# Altium PCB SENSORS_SMALL_PCB.PcbDoc
Units mil, origin at the board's own origin, x right, y up, seen from the top; angles counter-clockwise.
Board outline 4094.49 x 606.38 mil, 4 copper layers (01 SIGNAL, 02 GND, 03 PWR, 04 SIGNAL), stack 61.811 mil thick; 29 components, 26 nets, 132 pads, 52 vias.
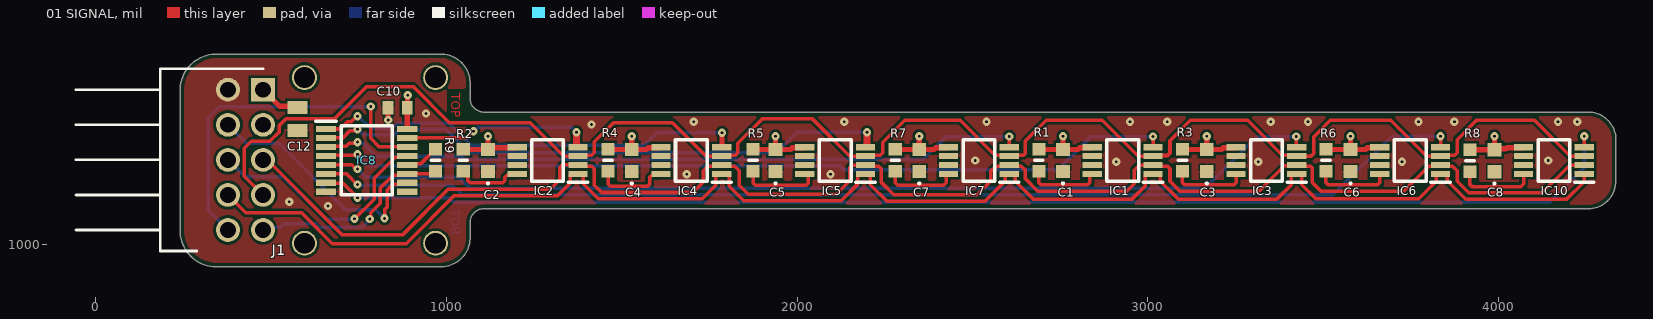
[diagram p0: 01 SIGNAL view]
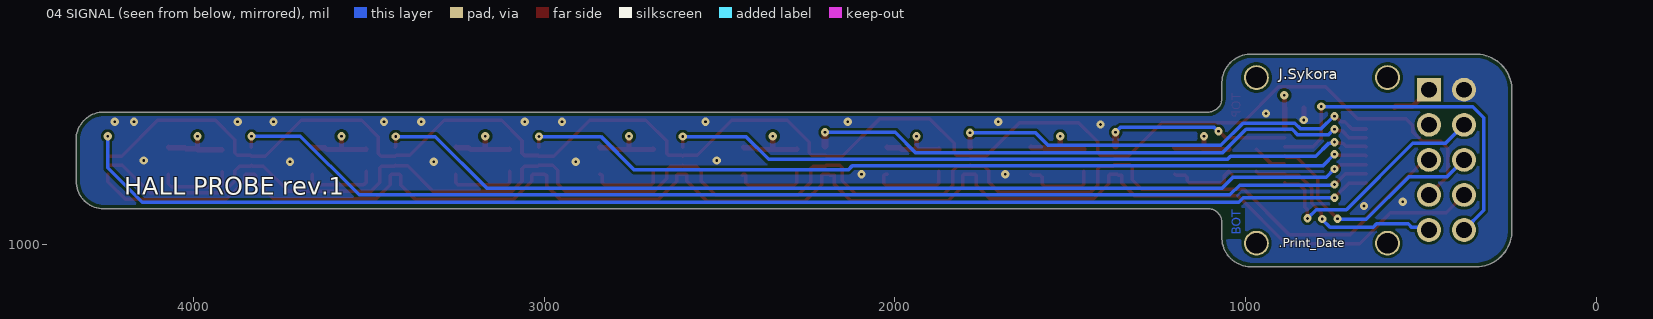
[diagram p1: 04 SIGNAL view, seen from below]
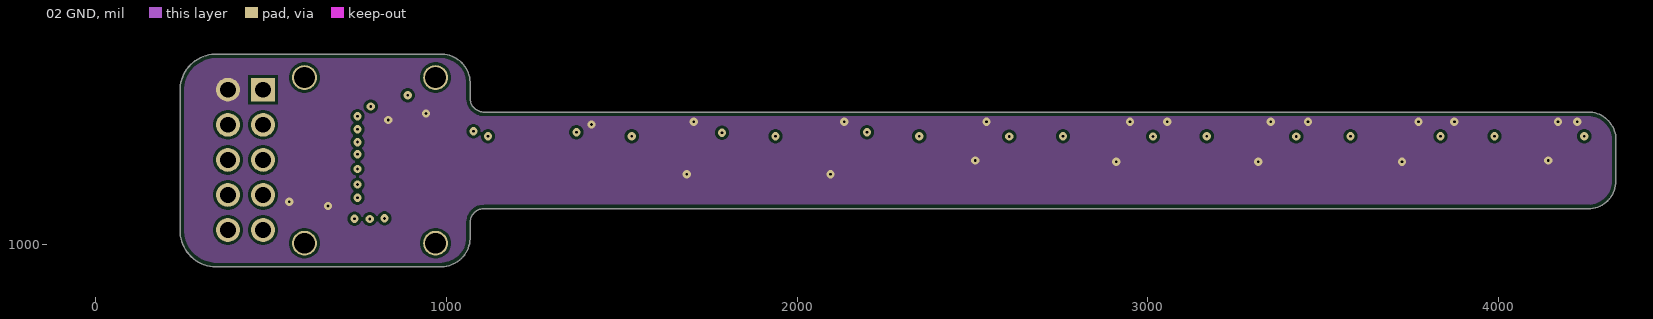
[diagram p2: 02 GND]
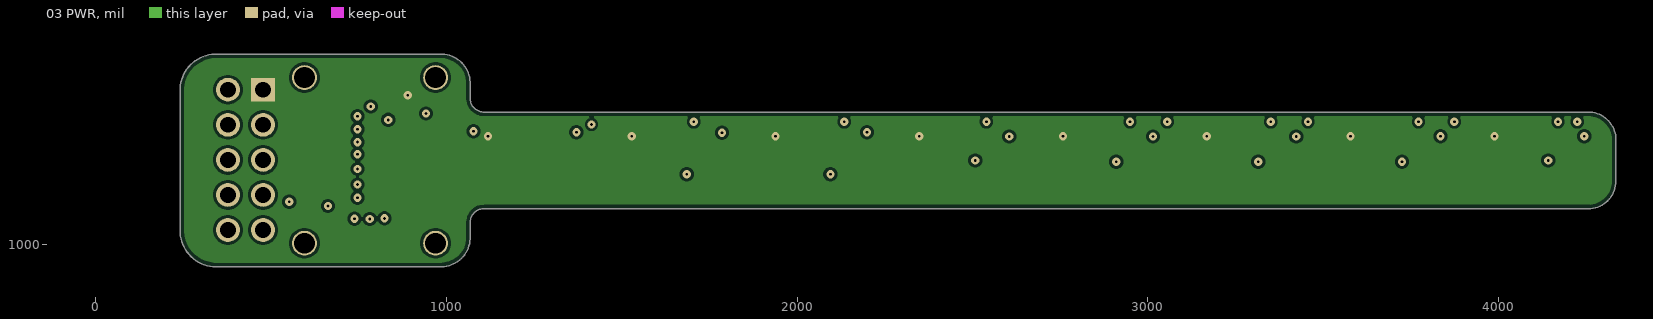
[diagram p3: 03 PWR]
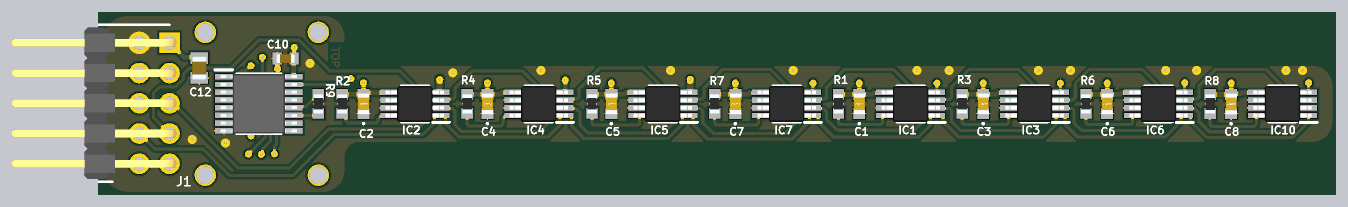
[diagram p4: 3D render of the assembled board from above, using the file's embedded part models]

## Layer stack, top to bottom
Top Solder: solder mask 0.5, Solder Resist, Dk 3.8
01 SIGNAL: signal copper 1.378
Dielectric 1: prepreg 3.937, 2313, Dk 4.05
02 GND: signal copper 0.689
Core: core 49.8031, FR-4, Dk 4.5
03 PWR: signal copper 0.689
Dielectric 2: prepreg 3.937, 2313, Dk 4.05
04 SIGNAL: signal copper 1.378
Bottom Solder: solder mask 0.5, Solder Resist, Dk 3.8

## Board outline
342.52,936.93 985.98,936.93 ccw(c984.25,1019.68) 1066.93,1023.62 1066.93,1062.99 cw(c1106.3,1062.99) 1106.3,1102.36 4255.91,1102.36 ccw(c4255.91,1181.1) 4334.65,1181.1 4334.65,1299.21 ccw(c4255.91,1299.21) 4255.91,1377.95 1106.3,1377.95 cw(c1106.3,1417.32) 1066.93,1417.32 1066.93,1456.69 ccw(c984.25,1460.63) 988.19,1543.31 338.58,1543.31 ccw(c342.52,1440.95) 240.16,1437.01 240.16,1043.31 ccw(c342.52,1039.37)

## Design rules (kind name [scope] priority, off if disabled: settings)
BoardOutlineClearance [All] p1: gap=11.81 ignorepadtopadclearanceinfootprint=FALSE
Clearance [All] p1: gap=7.87 ignorepadtopadclearanceinfootprint=FALSE
ComponentClearance [All] p1: gap=4 collisioncheckmode=3 verticalgap=4 showdistances=TRUE
DiffPairsRouting [All] p1: maxlimit=4 minlimit=4 mostfreqgap=4 toplayer_minwidth=4 toplayer_maxwidth=71497.94 toplayer_prefwidth=4 midlayer1_minwidth=4 midlayer1_maxwidth=71497.94 midlayer1_prefwidth=4 midlayer2_minwidth=4 midlayer2_maxwidth=71497.94 midlayer2_prefwidth=4 bottomlayer_minwidth=4 bottomlayer_maxwidth=71497.94 bottomlayer_prefwidth=4 maxuncoupledlength=500
Height [All] p1: minheight=0 maxheight=71497.94 prefheight=500
HoleSize [All] p1: absolutevalues=TRUE maxlimit=248.03 minlimit=3.94 maxpercent=80.000 minpercent=20.000
HoleToHoleClearance [All] p1: gap=9.84 allowstackedmicrovias=FALSE
MinimumAnnularRing [All] p1: minimumring=7.87
MinimumSolderMaskSliver [All] p1: minsoldermaskwidth=0
PlaneClearance [All] p1: clearance=4
PlaneConnect PlaneConnectPowerPads [InPadClass('PowerPads')] p1: planeconnectstyle=Direct reliefexpansion=20 reliefentries=4 reliefconductorwidth=10 reliefairgap=10
PlaneConnect [All] p2: pad.planeconnectstyle=Relief pad.reliefexpansion=11.81 pad.reliefentries=4 pad.reliefconductorwidth=4 pad.reliefairgap=4 via.planeconnectstyle=Direct via.reliefexpansion=11.81 via.reliefentries=4 via.reliefconductorwidth=5 via.reliefairgap=5
PolygonConnect PolygonConnectPowerPads [All vs (InPadClass('PowerPads'))] p1: connectstyle=Direct reliefconductorwidth=10 reliefentries=4 polygonreliefangle="90 Angle" airgapwidth=10
PolygonConnect [All] p2: thpad.connectstyle=Relief thpad.reliefconductorwidth=4 thpad.reliefentries=4 thpad.polygonreliefangle="90 Angle" thpad.airgapwidth=4 smdpad.connectstyle=Relief smdpad.reliefconductorwidth=4 smdpad.reliefentries=4 smdpad.polygonreliefangle="90 Angle" smdpad.airgapwidth=4 via.connectstyle=Direct via.reliefconductorwidth=5 via.reliefentries=4 via.polygonreliefangle="90 Angle" via.airgapwidth=5
RoutingVias [All] p1: holewidth=7.87 width=17.72 viastyle="Through Hole" minholewidth=7.87 minwidth=17.72 maxholewidth=248.03 maxwidth=257.87
SilkToSilkClearance [All] p1: silktosilkclearance=0
SilkToSolderMaskClearance [IsPad] p1: minsilkscreentomaskgap=4 clearancetoexposedcopper=TRUE
SolderMaskExpansion [All] p1: expansion=2.95 istentingtop=FALSE
Width [All] p1: maxlimit=71497.94 minlimit=7.87 preferedwidth=10
20 further rules are at their usual default settings.

## Components (designator, comment, footprint, x,y, rotation, side; value= is the part's Value field where it differs from the comment)
C1 "0.01uF" C0603 2757.99,1239.57 r90 top
C2 "0.01uF" C0603 1117.99,1239.57 r90 top
C3 "0.01uF" C0603 3167.99,1239.57 r90 top
C4 "0.01uF" C0603 1527.99,1239.57 r90 top
C5 "0.01uF" C0603 1937.99,1239.57 r90 top
C6 "0.01uF" C0603 3577.99,1239.57 r90 top
C7 "0.01uF" C0603 2347.99,1239.57 r90 top
C8 "0.01uF" C0603 3988.19,1239.17 r90 top
C10 "100nF" CAPC1608X95N 860.24,1389.76 r0 top
C12 "47uF 10VDC 0805" CAPC2012X145N 574.8,1358.27 r90 top
IC1 "TMAG5170A1QDGKR" SOP65P490X110-8N 2927.99,1239.57 r180 top
IC2 "TMAG5170A1QDGKR" SOP65P490X110-8N 1287.99,1239.57 r180 top
IC3 "TMAG5170A1QDGKR" SOP65P490X110-8N 3337.99,1239.57 r180 top
IC4 "TMAG5170A1QDGKR" SOP65P490X110-8N 1697.99,1239.57 r180 top
IC5 "TMAG5170A1QDGKR" SOP65P490X110-8N 2107.99,1239.57 r180 top
IC6 "TMAG5170A1QDGKR" SOP65P490X110-8N 3747.99,1239.57 r180 top
IC7 "TMAG5170A1QDGKR" SOP65P490X110-8N 2517.99,1239.57 r180 top
IC8 "M74HC595YTTR" SOP65P640X120-16N 771.65,1240.16 r0 top
IC10 "TMAG5170A1QDGKR" SOP65P490X110-8N 4157.99,1239.57 r180 top
J1 "M20-9950545" HDRRA10W66P254_2X5_1270X254X528P 476.38,1441.73 r90 top
R1 "10K" RESC1608X55N 2688.98,1240.16 r270 top
R2 "10K" RESC1608X55N 1047.24,1240.16 r270 top
R3 "10K" RESC1608X55N 3098.43,1240.16 r270 top
R4 "10K" RESC1608X55N 1460.63,1240.16 r270 top
R5 "10K" RESC1608X55N 1874.02,1240.16 r270 top
R6 "10K" RESC1608X55N 3507.87,1240.16 r270 top
R7 "10K" RESC1608X55N 2279.53,1240.16 r270 top
R8 "10K" RESC1608X55N 3918.54,1239.57 r270 top
R9 "0R" RESC1608X55N 968.5,1240.16 r270 top

## Footprints (in the part's own frame and the unit in brackets; to place one, negate y for a bottom-side part, rotate by r counter-clockwise, add the part's x,y. Pads: shape width x height; smd on the part's side, far side on the other; paste and mask are expansions set on the pad)
C0603 [mm]
  rect 0.95x1 smd: 1(-0.8,0) 2(0.8,0)
  silkscreen extent -1.7,-0.05 -1.6,0.05, body extent -0.87,-0.48 0.88,0.47, height 0.87
CAPC1608X95N [mm]
  rect 0.78x0.98 smd: 1(-0.7,0) 2(0.7,0)
  body extent -0.8,-0.4 0.8,0.4, height 0.95
CAPC2012X145N [mm]
  rect 0.97x1.47 smd: 1(-0.83,0) 2(0.83,0)
  body extent -1,-0.63 1,0.63, height 1.45
HDRRA10W66P254_2X5_1270X254X528P [mm]
  rect 1.725x1.725 hole 1.15: 1(0,0)
  round 1.725 hole 1.15: 2(0,2.54) 3(-2.54,0) 4(-2.54,2.54) 5(-5.08,0) 6(-5.08,2.54) 7(-7.62,0) 8(-7.62,2.54) 9(-10.16,0) 10(-10.16,2.54)
  silkscreen extent -11.68,0 1.52,13.54, body extent -11.43,-0.53 1.27,13.23, height 2.54
RESC1608X55N [mm]
  rect 0.9x0.95 smd: 1(-0.8,0) 2(0.8,0)
  silkscreen extent 0,-0.3 0,0.3, body extent -0.8,-0.4 0.8,0.4, height 0.55
SOP65P490X110-8N [mm]
  rect 1.4x0.45 smd: 1(-2.2,0.975) 2(-2.2,0.325) 3(-2.2,-0.325) 4(-2.2,-0.975) 5(2.2,-0.975) 6(2.2,-0.325) 7(2.2,0.325) 8(2.2,0.975)
  silkscreen extent -2.9,-1.5 1.15,1.55, body extent -2.45,-1.5 2.45,1.5, height 1.1
SOP65P640X120-16N [mm]
  rect 1.475x0.45 smd: 1(-2.938,2.275) 2(-2.938,1.625) 3(-2.938,0.975) 4(-2.938,0.325) 5(-2.938,-0.325) 6(-2.938,-0.975) 7(-2.938,-1.625) 8(-2.938,-2.275) 9(2.938,-2.275) 10(2.938,-1.625) 11(2.938,-0.975) 12(2.938,-0.325) 13(2.938,0.325) 14(2.938,0.975) 15(2.938,1.625) 16(2.938,2.275)
  silkscreen extent -3.67,-2.5 1.85,2.85, body extent -3.2,-2.5 3.2,2.5, height 1.2

## Part data
C1 C2 C3 C4 C5 C6 C7 C8: library part C0603C103J4RACTU, "Capacitor", Manufacturer_Name=KEMET, Mouser Part Number=80-C0603C103J4R, Arrow Part Number=C0603C103J4RACTU, Arrow Price/Stock=https://www.arrow.com/en/products/c0603c103j4ractu/kemet-corporation, Datasheet Link=https://content.kemet.com/datasheets/KEM_C1002_X7R_SMD.pdf, Height=0.87mm, Manufacturer_Part_Number=C0603C103J4RACTU, Mouser Price/Stock=https://www.mouser.com/Search/Refine.aspx?Keyword=80-C0603C103J4R
C10: library part C0603C104J4RAC, "Capacitor", Manufacturer_Name=KEMET, Mouser Part Number=80-C0603C104J4RAC, Arrow Part Number=C0603C104J4RAC, Arrow Price/Stock=https://www.arrow.com/en/products/c0603c104j4rac/kemet-corporation?region=nac, Datasheet Link=https://datasheet.datasheetarchive.com/originals/distributors/SFDatasheet-4/sf-00083930.pdf, Height=0.95mm, Manufacturer_Part_Number=C0603C104J4RAC, Mouser Price/Stock=https://www.mouser.co.uk/ProductDetail/KEMET/C0603C104J4RAC?qs=sykUljcfnH31MXmq5HGjkg%3D%3D
C12: library part GRM21BR61A476ME15K, "Capacitor", Manufacturer_Name="Murata Electronics", Mouser Part Number=81-GRM21BR61A476ME5K, Arrow Part Number=GRM21BR61A476ME15K, Arrow Price/Stock=https://www.arrow.com/en/products/grm21br61a476me15k/murata-manufacturing?region=nac, Datasheet Link=http://www.murata.com/~/media/webrenewal/support/library/catalog/products/capacitor/mlcc/c02e.pdf, Height=1.45mm, Manufacturer_Part_Number=GRM21BR61A476ME15K, Mouser Price/Stock=https://www.mouser.co.uk/ProductDetail/Murata-Electronics/GRM21BR61A476ME15K?qs=hNud%2FORuBR153XPtoO6XtA%3D%3D
IC1 IC2 IC3 IC4 IC5 IC6 IC7 IC10: "Integrated Circuit", Manufacturer_Name="Texas Instruments", Mouser Part Number=595-TMAG5170A1QDGKR, Arrow Part Number=TMAG5170A1QDGKR, Arrow Price/Stock=https://www.arrow.com/en/products/tmag5170a1qdgkr/texas-instruments?region=nac, Datasheet Link=https://www.ti.com/lit/ds/symlink/tmag5170.pdf?ts=1631468164599&ref_url=https%253A%252F%252Fwww.ti.com%252Fsitesearch%252Fdocs%252Funiversalsearch.tsp%253FlangPref%253Den-US%2526searchTerm%253DTMAG5170A1QDGKR%2526nr%253D4, Height=1.1mm, Manufacturer_Part_Number=TMAG5170A1QDGKR, Mouser Price/Stock=https://www.mouser.co.uk/ProductDetail/Texas-Instruments/TMAG5170A1QDGKR?qs=7D1LtPJG0i2KumggWL5Glw%3D%3D
IC8: "Integrated Circuit", Manufacturer_Name=STMicroelectronics, Mouser Part Number=511-M74HC595YTTR, Arrow Part Number=M74HC595YTTR, Arrow Price/Stock=https://www.arrow.com/en/products/m74hc595yttr/stmicroelectronics, Datasheet Link=https://componentsearchengine.com/Datasheets/1/M74HC595YTTR.pdf, Height=1.2mm, Manufacturer_Part_Number=M74HC595YTTR, Mouser Price/Stock=https://www.mouser.co.uk/ProductDetail/STMicroelectronics/M74HC595YTTR?qs=WHlX%252B%252B9%2FRwCpo6YE5YKRQQ%3D%3D
J1: "Connector", Manufacturer_Name=Harwin, Mouser Part Number=855-M20-9950545, Datasheet Link=https://cdn.harwin.com/pdfs/M20-995.pdf, Height=5.28mm, Manufacturer_Part_Number=M20-9950545, Mouser Price/Stock=https://www.mouser.com/Search/Refine.aspx?Keyword=855-M20-9950545
R1 R2 R3 R4 R5 R6 R7 R8 R9: library part RK73B1JTTD103J, "Resistor", Manufacturer_Name="KOA Speer", Mouser Part Number=660-RK73B1JTTD103J, Arrow Part Number=RK73B1JTTD103J, Arrow Price/Stock=https://www.arrow.com/en/products/rk73b1jttd103j/koa-speer-electronics?region=asia, Datasheet Link=http://www.koaspeer.com/catimages/Products/RK73-RT/RK73-RT.pdf, Height=0.55mm, Manufacturer_Part_Number=RK73B1JTTD103J, Mouser Price/Stock=https://www.mouser.co.uk/ProductDetail/KOA-Speer/RK73B1JTTD103J?qs=hmtrJ2UjXcBKRTcwO9LloQ%3D%3D

## Free pads (board coordinates)
  round 70.87 hole 59.06: 2(968.5,1476.38) 3(968.5,1003.94) 4(594.49,1003.94) 5(594.49,1476.38)

## Via types
v1: diameter 23.62, hole 7.87, 01 SIGNAL to 04 SIGNAL, 52 vias

## Nets (pads, with @x,y where several pads share a name; then routed paths per layer and width w, separated by ;. In a path a pad name is that pad's centre, name@x,y a point inside that pad or via, vN(x,y) a via of type N, cw(c..) or ccw(c..) an arc to the next point about the centre after c; other vN are vias at no path point)
+3V3_S: C1.2 C2.2 C3.2 C4.2 C5.2 C6.2 C7.2 C8.2 C10.2 C12.2 IC1.5 IC2.5 IC3.5 IC4.5 IC5.5 IC6.5 IC7.5 IC8.16 IC10.5 J1.1 R1.1 R2.1 R3.1 R4.1 R5.1 R6.1 R7.1 R8.1 | length 1761.5
  01 SIGNAL w15: J1.1 523.37,1394.74 571,1394.74 C12.2 ; IC8.16 887.56,1329.96 887.56,1389.53 888.29,1390.26 888.29,1425.69 v1(888.78,1426.18) ; R2.1 1047.54,1271.36 1117.7,1271.36 C2.2 ; v1(1117.99,1309.06) C2.2 ; IC2.5 1200.02,1276.59 1123.52,1276.59 C2.2 ; R4.1 1460.93,1271.36 1527.7,1271.36 C4.2 ; v1(1527.99,1309.06) C4.2 ; IC4.5 1610.02,1276.59 1575.71,1276.59 1570.18,1271.06 C4.2 ; R5.1 1874.31,1271.36 1937.7,1271.36 C5.2 ; v1(1937.99,1309.06) C5.2 ; IC5.5 2020.02,1276.59 1985.71,1276.59 1980.18,1271.06 C5.2 ; R7.1 2279.82,1271.36 2347.7,1271.36 C7.2 ; v1(2347.99,1309.06) C7.2 ; IC7.5 2430.02,1276.59 2395.71,1276.59 2390.18,1271.06 C7.2 ; R1.1 2689.27,1271.36 2757.7,1271.36 C1.2 ; v1(2757.99,1309.06) C1.2 ; IC1.5 2840.02,1276.59 2805.71,1276.59 2800.18,1271.06 C1.2 ; R3.1 3098.72,1271.36 3167.7,1271.36 C3.2 ; v1(3167.99,1309.06) C3.2 ; IC3.5 3250.02,1276.59 3215.71,1276.59 3210.18,1271.06 C3.2 ; R6.1 3508.17,1271.36 3577.7,1271.36 C6.2 ; v1(3577.99,1309.06) C6.2 ; IC6.5 3660.02,1276.59 3625.71,1276.59 3620.18,1271.06 C6.2 ; R8.1 3918.74,1270.87 3987.99,1270.87 C8.2 ; v1(3988.19,1309.06) C8.2 ; IC10.5 4070.02,1276.59 4024.63,1276.59 4021.59,1273.56 3991.08,1273.56 C8.2
CS_SEN1: IC2.4 IC8.15 | length 546.8
  01 SIGNAL w10: IC8.15 1055.76,1304.13 1075.02,1323.39 v1(1076.77,1323.39) ; IC2.4@1370.08,1280.81 1372.94,1277.95 IC2.4
  01 SIGNAL w20: IC2.4@1370.08,1280.81 v1(1370.08,1320.69)
  04 SIGNAL w10: v1(1076.77,1323.39) 1078.19,1323.39 1089.44,1334.65 1356.13,1334.65 v1(1370.08,1320.69)
CS_SEN2: IC4.4 IC8.1 | length 1247.7
  01 SIGNAL w10: IC8.1 695.81,1329.72 716.13,1350.04 727.18,1350.04 743.25,1366.11 v1(746.04,1366.11)
  01 SIGNAL w15: IC4.4 1785.43,1278.78 v1(1785.43,1318.9)
  04 SIGNAL w10: v1(746.04,1366.11) 748.06,1366.11 783.19,1330.99 843.77,1330.99 859.39,1346.61 1006.73,1346.61 1069.88,1283.46 1562.99,1283.46 1598.43,1318.9 v1(1785.43,1318.9)
CS_SEN3: IC5.4 IC8.2 | length 1664.1
  01 SIGNAL w10: IC8.2 703.28,1304.13 724.53,1325.38 744.67,1325.38 v1@748.03,1328.74 ; IC5.4 2195.96,1277.95 IC5.4@2198.82,1280.81
  01 SIGNAL w20: IC5.4@2198.82,1280.81 v1(2198.82,1320.69)
  04 SIGNAL w10: v1@748.03,1328.74 764.02,1312.76 850.81,1312.76 866.8,1328.74 998.03,1328.74 1065.47,1261.3 1939.62,1261.3 1999.01,1320.69 v1(2198.82,1320.69)
  other v1: 746.06,1328.74
CS_SEN4: IC7.4 IC8.3 | length 2032.7
  01 SIGNAL w10: IC8.3 657.95,1280.51 713.27,1280.51 721.72,1288.96 743.69,1288.96 v1@747.05,1292.32 ; IC7.4 v1(2604.61,1308.24)
  04 SIGNAL w10: v1(746.06,1292.32) 748.62,1289.76 761.42,1289.76 799.21,1251.97 1042.32,1251.97 1050.87,1243.43 2359.57,1243.43 2424.39,1308.24 v1(2604.61,1308.24)
CS_SEN5: IC1.4 IC8.4 | length 2449
  01 SIGNAL w10: IC8.4 658.44,1255.41 743.6,1255.41 v1(746.06,1257.87) ; IC1.4 v1(3014.61,1308.24)
  04 SIGNAL w10: v1(746.06,1257.87) 778.39,1225.55 2120.3,1225.55 2132.88,1212.97 2742.5,1212.97 2837.77,1308.24 v1(3014.61,1308.24)
CS_SEN6: IC3.4 IC8.5 | length 2886
  01 SIGNAL w10: IC8.5 729.5,1227.36 741.31,1215.55 v1(746.06,1215.55) ; v1(3423.23,1308.07) 3423.23,1279.33 IC3.4
  04 SIGNAL w10: v1(746.06,1215.55) 769.68,1191.93 1035.43,1191.93 1065.94,1161.42 3163.39,1161.42 3310.04,1308.07 v1(3423.23,1308.07)
CS_SEN7: IC6.4 IC8.6 | length 3311.8
  01 SIGNAL w10: IC8.6 714.57,1201.77 v1@745.08,1171.26 ; IC6.4 v1(3834.61,1309.06) v1@3834.61,1316.93
  04 SIGNAL w10: v1@745.08,1171.26 746.64,1169.7 1016.33,1169.7 1044.29,1141.73 3527.56,1141.73 3694.88,1309.06 v1(3834.61,1309.06)
  other v1: 746.06,1171.26
CS_SEN8: IC8.7 IC10.4 | length 3781.4
  01 SIGNAL w10: IC8.7 656.48,1175.69 704.23,1175.69 v1(746.06,1133.86) ; IC10.4 IC10.4@4244.61,1280.78 ; IC10.4@4244.64,1280.81 v1@4244.64,1316.89
  04 SIGNAL w10: v1(746.06,1133.86) 1005.91,1133.86 1019.13,1120.64 4146.23,1120.64 4244.61,1219.02 v1(4244.61,1309.06)
GND: C1.1 C2.1 C3.1 C4.1 C5.1 C6.1 C7.1 C8.1 C10.1 C12.1 IC1.6 IC1.7 IC2.6 IC2.7 IC3.6 IC3.7 IC4.6 IC4.7 IC5.6 IC5.7 IC6.6 IC6.7 IC7.6 IC7.7 IC8.8 IC10.6 IC10.7 J1.2 | length 34.4
  01 SIGNAL w15: C10.1 833.11,1389.33 833.11,1356.11 v1(833.54,1355.67)
  other v1: 661.42,1110.24 551.18,1122.05 1685.04,1200.79 2094.49,1200.79 2909.45,1236.22 3314.96,1236.22 3724.41,1236.22 2507.87,1240.16 4141.73,1240.16 1413.39,1342.52 1704.72,1350.39 2133.86,1350.39 2539.37,1350.39 2948.82,1350.39 3055.12,1350.39 3350.39,1350.39 3456.69,1350.39 3771.65,1350.39 3874.02,1350.39 4169.29,1350.39 4224.41,1350.39 940.94,1374.02
MISO_SEN: IC1.3 IC2.3 IC3.3 IC4.3 IC5.3 IC6.3 IC7.3 IC10.3 J1.7 | length 4874
  01 SIGNAL w10: J1.7 423.21,1194.9 423.21,1275.24 442.87,1294.9 495.78,1294.9 523.21,1322.33 523.21,1340.23 541.24,1358.27 679.13,1358.27 771.73,1450.87 904.63,1450.87 1007.42,1348.08 1238.54,1348.08 1334.25,1252.36 IC2.3 1377.46,1255.22 1414.23,1255.22 1421.26,1262.25 1421.26,1293.31 1476.03,1348.08 1644.05,1348.08 1739.76,1252.36 IC4.3 1787.46,1255.22 1823.68,1255.22 1830.71,1262.25 1830.71,1289.37 1899.61,1358.27 2043.31,1358.27 2149.21,1252.36 IC5.3 2197.46,1255.22 2237.07,1255.22 2244.09,1262.25 2244.09,1292.32 2306.1,1354.33 2464.57,1354.33 2563.68,1255.22 2601.75,1255.22 IC7.3 2607.46,1255.22 2645.83,1255.22 2649.61,1259 2649.61,1294.29 2709.65,1354.33 2870.08,1354.33 2972.05,1252.36 IC1.3 3016.4,1254.16 3055.96,1254.16 3062.99,1261.19 3062.99,1296.26 3121.06,1354.33 3284.45,1354.33 3383.56,1255.22 3421.75,1255.22 IC3.3 3464.96,1252.36 3472.44,1259.84 3472.44,1307.09 3519.69,1354.33 3692.91,1354.33 3794.88,1252.36 IC6.3 3837.46,1255.22 3874.86,1255.22 3881.89,1262.25 3881.89,1299.21 3937.01,1354.33 4102.36,1354.33 4204.33,1252.36 IC10.3
MOSI_SEN: IC1.2 IC2.2 IC3.2 IC4.2 IC5.2 IC6.2 IC7.2 IC10.2 J1.5 | length 4650.2
  01 SIGNAL w10: J1.5 488.58,1241.73 702.76,1027.56 874.02,1027.56 1003.94,1157.48 1295.28,1157.48 1322.83,1185.04 1322.83,1220.47 1330.71,1228.35 1373.03,1228.35 IC2.2 1377.46,1223.91 1413.88,1223.91 1421.26,1216.54 1421.26,1169.29 1441.93,1148.62 1701.54,1148.62 1731.47,1178.55 1731.47,1210.8 1744.58,1223.91 1781.75,1223.91 IC4.2 1787.46,1223.91 1821.36,1223.91 1834.65,1210.63 1834.65,1169.29 1860.68,1143.26 2110.86,1143.26 2149.61,1182 2149.61,1219.74 2156.64,1226.77 IC5.2 2197.46,1223.91 2232.78,1223.91 2240.16,1216.54 2240.16,1177.17 2275.59,1141.73 2511.81,1141.73 2551.18,1181.1 2551.18,1208.66 2566.43,1223.91 2601.75,1223.91 IC7.2 2607.46,1223.91 2639.14,1223.91 2649.61,1213.44 2649.61,1188.98 2686.02,1152.56 2939.96,1152.56 2960.63,1173.23 2960.63,1212.6 2974.8,1226.77 IC1.2 3017.46,1223.91 3055.96,1223.91 3062.99,1216.88 3062.99,1181.1 3092.52,1151.57 3316.08,1151.57 3389.13,1224.62 3422.45,1224.62 IC3.2 3427.46,1223.91 3464.33,1223.91 3468.5,1219.74 3468.5,1177.17 3494.09,1151.57 3728.35,1151.57 3800.69,1223.91 3831.75,1223.91 IC6.2 3837.46,1223.91 3868.61,1223.91 3881.89,1210.63 3881.89,1181.1 3915.35,1147.64 4124.02,1147.64 4203.15,1226.77 IC10.2
MOSI_SHREG: IC8.14 J1.10 | length 1025.1
  01 SIGNAL w10: v1(783.46,1393.7) 783.46,1303.15 808.07,1278.54 IC8.14
  04 SIGNAL w10: J1.10 319.88,1098.23 319.88,1362.2 351.38,1393.7 v1(783.46,1393.7)
NetIC1_8: IC1.8 R1.2 | length 210.6
  01 SIGNAL w10: R1.2 2688.98,1177.12 2694.83,1171.26 2828.74,1171.26 2834.6,1177.12 2834.6,1197.32 2838.46,1201.18 IC1.8
NetIC2_8: IC2.8 R2.2 | length 202.8
  01 SIGNAL w10: R2.2@1039.23,1200.64 R2.2 1047.95,1208.66 1059.67,1196.94 1059.67,1183.21 1066.7,1176.18 1159.5,1176.18 1165.35,1182.04 1165.35,1191.47 1171.21,1197.32 1197.52,1197.32 IC2.8
NetIC3_8: IC3.8 R3.2 | length 214.2
  01 SIGNAL w10: R3.2 3098.43,1177.17 3104.33,1171.26 3246.11,1171.26 3251.97,1177.12 3251.97,1200.59 IC3.8
NetIC4_8: IC4.8 R4.2 | length 215
  01 SIGNAL w10: R4.2 1460.63,1172.35 1466.49,1166.5 1572.88,1166.5 1578.74,1172.35 1578.74,1191.47 1584.6,1197.32 1607.52,1197.32 IC4.8
NetIC5_8: IC5.8 R5.2 | length 229.7
  01 SIGNAL w10: R5.2 1874.02,1175.15 1879.87,1169.29 2025.64,1169.29 2031.5,1175.15 2031.5,1197.32 2027.64,1201.18 IC5.8
NetIC6_8: IC6.8 R6.2 | length 214
  01 SIGNAL w10: R6.2 3507.87,1177.12 3513.73,1171.26 3655.51,1171.26 3661.38,1177.13 IC6.8
NetIC7_8: IC7.8 R7.2 | length 213.9
  01 SIGNAL w10: R7.2 2279.53,1176.32 2286.56,1169.29 2418.17,1169.29 2425.2,1176.32 2425.2,1198.32 IC7.8@2428.06,1201.18 ; IC7.8 IC7.8@2434.23,1198.33
NetIC10_8: IC10.8 R8.2 | length 222.8
  01 SIGNAL w10: R8.2 3918.54,1171.41 3924.4,1165.55 4063.19,1165.55 4071.38,1173.74 IC10.8
OE: IC8.13 J1.6 | length 691.2
  01 SIGNAL w10: v1(737.2,1073.98) 737.36,1073.98 793.15,1129.76 793.15,1189.29 852.95,1249.09 857.43,1249.09 883.46,1249.09 IC8.13
  04 SIGNAL w10: J1.6 425.2,1192.91 534.45,1192.91 655.51,1071.85 735.08,1071.85 v1(737.2,1073.98)
RCK_SHREG: IC8.12 R9.1 | length 99.5
  01 SIGNAL w10: IC8.12 891.18,1231.22 927.09,1231.22 967.52,1271.65 R9.1
SCK_SEN: IC1.1 IC2.1 IC3.1 IC4.1 IC5.1 IC6.1 IC7.1 IC10.1 J1.8 | length 4635.1
  01 SIGNAL w10: J1.8 427.56,1090.55 586.61,1090.55 594.49,1082.68 674.21,1002.95 884.84,1002.95 1020.67,1138.78 1315.94,1138.78 1353.05,1175.88 1353.05,1198.32 1362.2,1198.32 1365.06,1201.18 IC2.1 1386.91,1201.18 1389.76,1198.32 1389.76,1173.23 1432.24,1130.75 1729.17,1130.75 1767.72,1169.29 1767.72,1198.32 1770.57,1201.18 IC4.1 1803.31,1201.18 1806.17,1198.32 1806.17,1166.28 1847.06,1125.38 2125.38,1125.38 2173.05,1173.05 2173.05,1198.32 2185.04,1198.32 2187.9,1201.18 IC5.1 2205.8,1201.18 2208.66,1198.32 2208.66,1171.26 2256.06,1123.86 2535.28,1123.86 2592.52,1181.1 2592.52,1198.32 2595.38,1201.18 IC7.1 2619.19,1201.18 2622.05,1198.32 2622.05,1181.1 2673.23,1129.92 2954.72,1129.92 2993.05,1168.24 2993.05,1198.32 2996.06,1198.32 2998.92,1201.18 IC1.1 3032.57,1201.18 3035.43,1198.32 3035.43,1181.1 3086.61,1129.92 3368.11,1129.92 3409.45,1171.26 3409.45,1198.32 3412.31,1201.18 IC3.1 3436.12,1201.18 3438.98,1198.32 3438.98,1171.26 3479.33,1130.91 3772.64,1130.91 3822.83,1181.1 3822.83,1198.32 3825.69,1201.18 IC6.1 3850.68,1201.18 3853.54,1198.32 3853.54,1182.24 3906.85,1128.94 4193.9,1128.94 4244.61,1179.65 IC10.1
SCK_SHREG: IC8.11 J1.9 R9.2 | length 604.3
  01 SIGNAL w10: v1(780.51,1072.83) 783.48,1075.8 783.48,1090.57 811.02,1118.11 811.02,1161.42 847.52,1197.91 883.46,1197.91 IC8.11 961.61,1201.77 R9.2
  04 SIGNAL w10: J1.9 483.6,1048.96 525.33,1048.96 535.43,1059.06 625.98,1059.06 635.75,1049.29 758.57,1049.29 780.51,1071.24 v1(780.51,1072.83)
SCLR: IC8.10 J1.4 | length 706.4
  01 SIGNAL w10: v1(822.83,1074.8) 822.83,1099.29 830.71,1107.16 830.71,1155.82 847.21,1172.32 883.46,1172.32 IC8.10
  04 SIGNAL w10: J1.4 429.23,1288.88 522.15,1288.88 711.61,1099.41 798.23,1099.41 v1(822.83,1074.8)
pads on no net: IC8.9 J1.3

## Polygon pours and split planes (outlines as drawn)
GND on 02 GND "GND_L02_P011" (solid, pour order 11): -38.39,1574.8 4413.39,1574.8 4413.39,885.83 -38.39,885.83
GND on 04 SIGNAL "GND_L04_P013" (solid, pour order 13): -62.01,1574.8 4511.81,1574.8 4511.81,885.83 4413.39,787.4 -62.01,787.4
GND on 01 SIGNAL "TGA" (solid, pour order 10): -72.83,1574.8 4413.39,1574.8 4413.39,885.83 -72.83,885.83
+3V3_S on 03 PWR "TG" (solid, pour order 16): -114.17,1673.23 4413.39,1673.23 4413.39,787.4 -114.17,787.4

## Other copper
01 SIGNAL:
  text "TOP" at 1012.87,1432.01 h25 r270
04 SIGNAL:
  text "BOT" at 1012.87,1028.62 h25 r270

## Silkscreen, mask and mechanical layers (free items; w line width, h text height)
Bottom Overlay:
  text "J.Sykora" at 904.45,1471.69 h30
  text "HALL PROBE rev.1" at 4196.85,1141.73 h50
  text ".Print_Date" at 904.45,992.82 h25